# Altium PCB RFR24 AMS Design - MCU Stackup PCB V1.PcbDoc
Units mil, origin at the board's own origin, x right, y up, seen from the top; angles counter-clockwise.
Board outline 3960.47 x 1484.09 mil, 2 copper layers (Top Layer, Bottom Layer); 60 components, 283 nets, 228 pads, 43 vias.
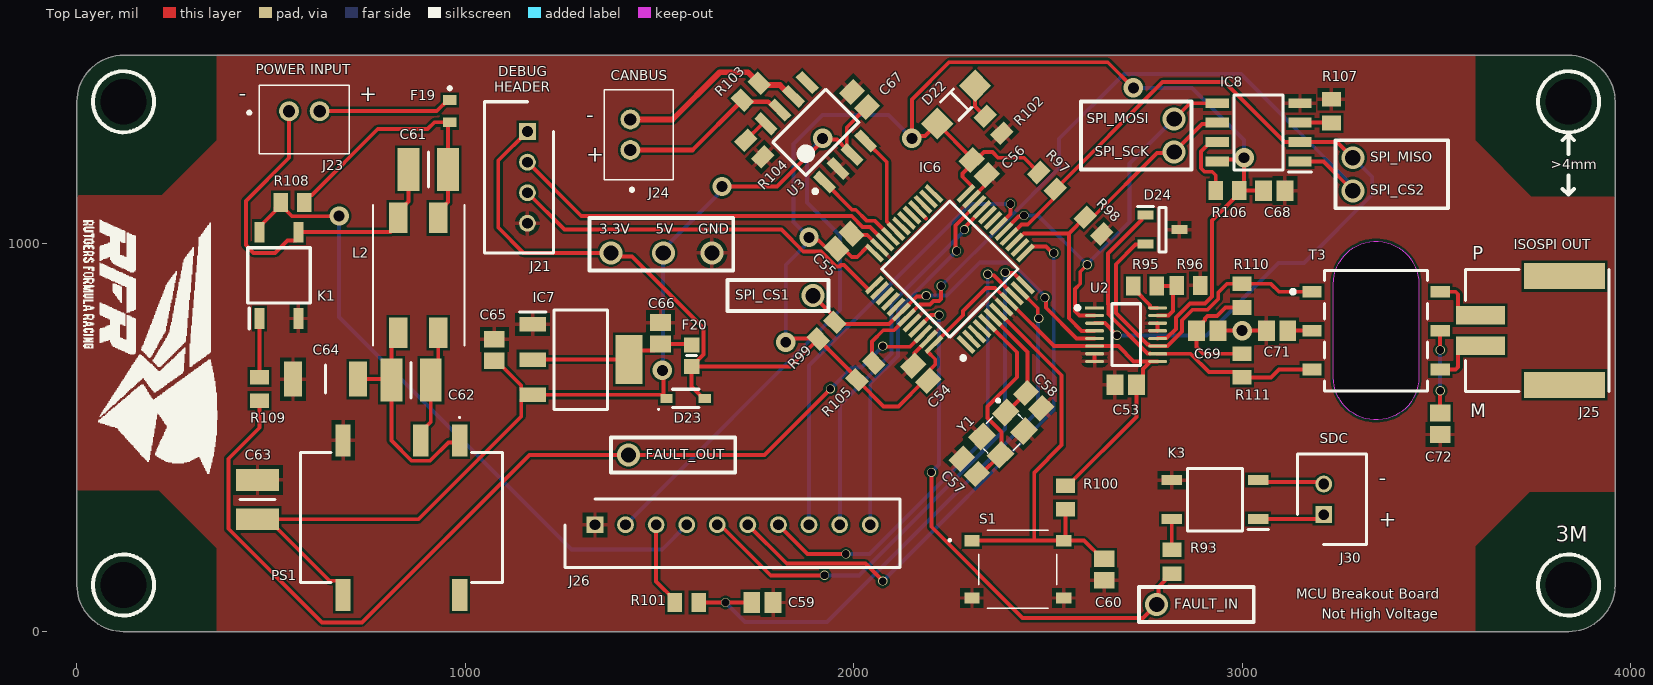
[diagram p0: Top Layer view]
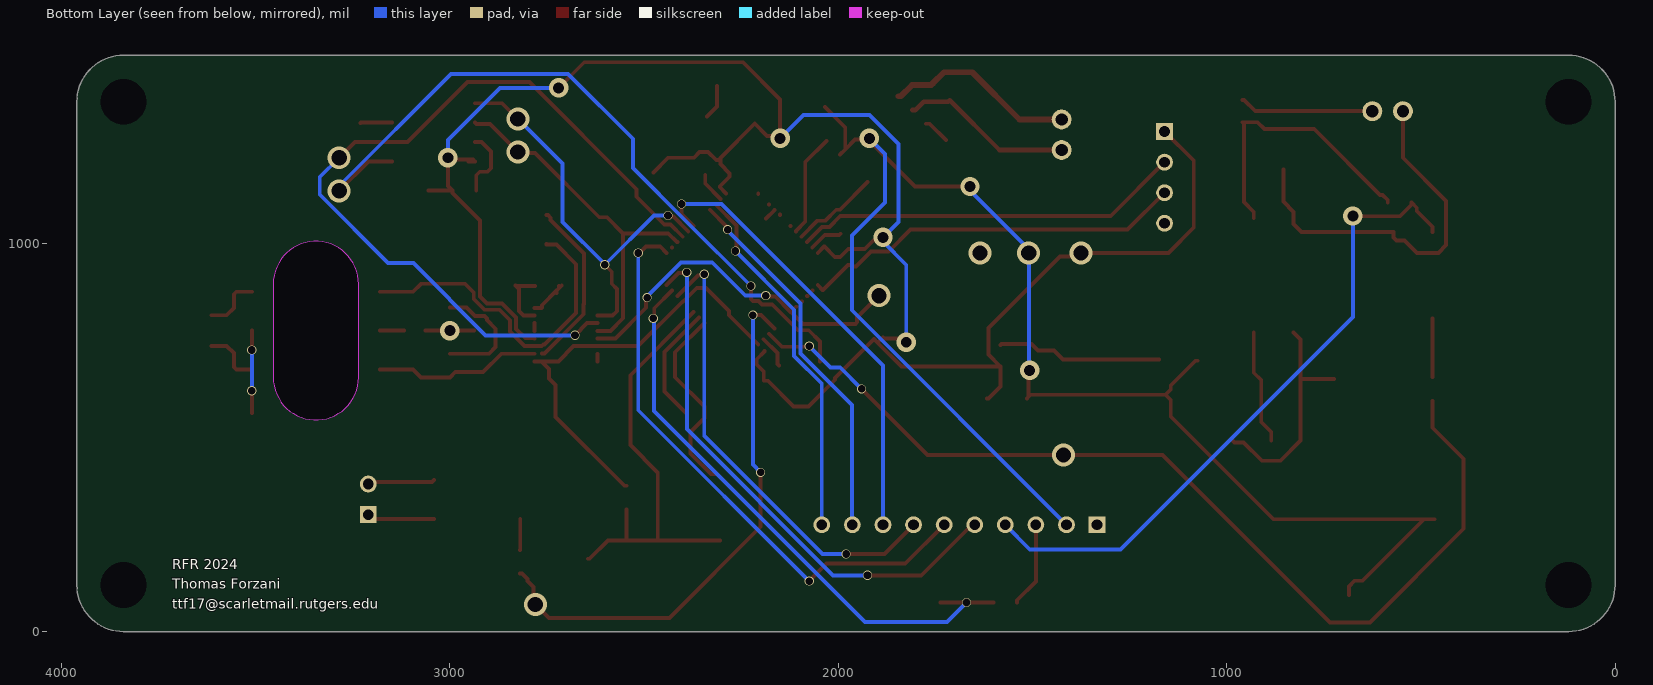
[diagram p1: Bottom Layer view, seen from below]
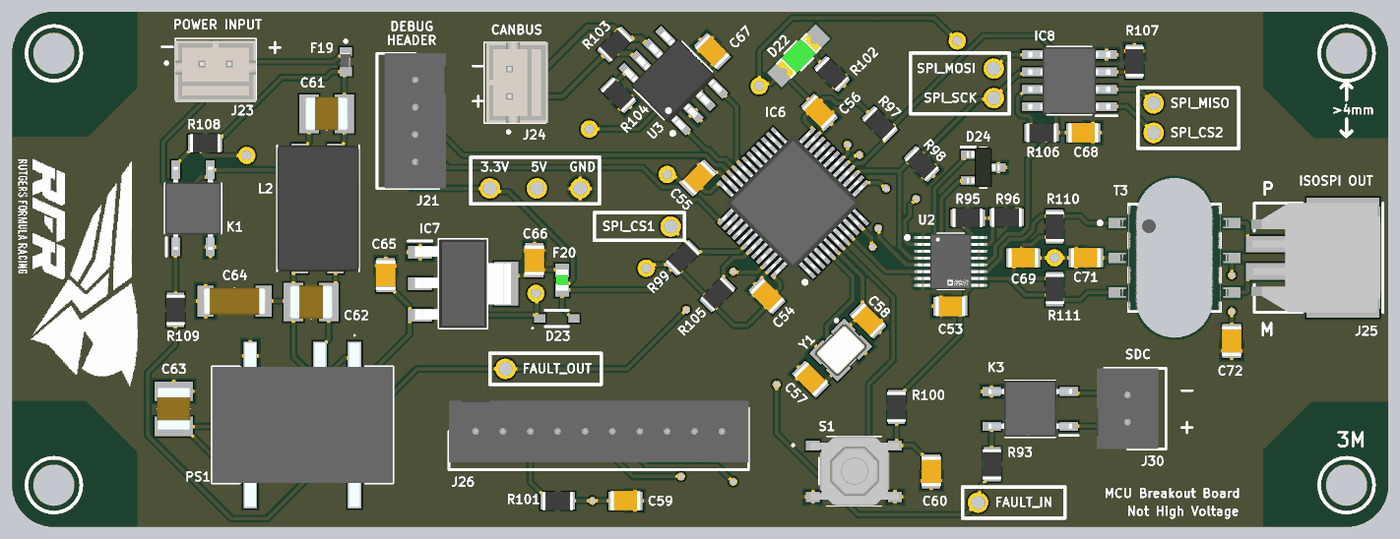
[diagram p2: 3D render of the assembled board from above, using the file's embedded part models]

## Layer stack, top to bottom
Top Solder: solder mask 0.4, Solder Resist, Dk 3.5
Top Layer: signal copper 1.4
Dielectric2: dielectric 12.6, FR-4, Dk 4.8
Bottom Layer: signal copper 1.4
Bottom Solder: solder mask 0.4, Solder Resist, Dk 3.5

## Board outline
0,120 0,1364.09 cw(c120,1364.09) 120,1484.09 3840.47,1484.09 cw(c3840.47,1364.09) 3960.47,1364.09 3960.47,120 cw(c3840.47,120) 3840.47,0 120,0 cw(c120,120)
cut-out: 3235,655 3235,895 cw(c3345,895.11) 3455,895 3455,655 cw(c3345,655)

## Design rules (kind name [scope] priority, off if disabled: settings)
Clearance [All] p1: gap=6 ignorepadtopadclearanceinfootprint=FALSE except(0: Arc-Hole Track-Hole SMDPad-Hole THPad-Hole Via-Hole Fill-Hole Poly-Hole Region-Hole Text-Hole)
DiffPairsRouting "Schematic Differential Pairs Routing" [InNet('CAN_P')] p1: maxlimit=10 minlimit=4 mostfreqgap=10 toplayer_minwidth=7 toplayer_maxwidth=12 toplayer_prefwidth=12 bottomlayer_minwidth=7 bottomlayer_maxwidth=12 bottomlayer_prefwidth=12 maxuncoupledlength=500
DiffPairsRouting [All] p2: maxlimit=10 minlimit=10 mostfreqgap=10 toplayer_minwidth=15 toplayer_maxwidth=15 toplayer_prefwidth=15 bottomlayer_minwidth=15 bottomlayer_maxwidth=15 bottomlayer_prefwidth=15 maxuncoupledlength=500
Length "Schematic Length Constraint" [InNetClass('Fuse')] p1: maxlimit=5905.51 minlimit=0
MatchedLengths "Schematic Matched Net Lengths" [InNetClass('I2C')] p1: tolerance=1000 checknetsindiffpair=FALSE checkdiffpairvsdiffpair=TRUE checkxsignals=TRUE checkothers=TRUE
PolygonConnect [All] p1: connectstyle=Relief reliefconductorwidth=10 reliefentries=4 polygonreliefangle="90 Angle" airgapwidth=10
RoutingVias [All] p1: holewidth=28 width=50 viastyle="Through Hole" minholewidth=28 minwidth=50 maxholewidth=28 maxwidth=50
SolderMaskExpansion [All] p1: expansion=4 istentingtop=FALSE
Width "Schematic Width Constraint" [InNetClass('HV')] p1: maxlimit=25 minlimit=10 preferedwidth=10 minimp=50.000000 maximp=50.000000 favimp=50.000000
Width [All] p2: maxlimit=10 minlimit=10 preferedwidth=10
29 further rules are at their usual default settings.

## Classes and differential pairs
net class TEMP[1..18]: TEMP1 TEMP2 TEMP3 TEMP4 TEMP5 TEMP6 TEMP7 TEMP8 TEMP9 TEMP10 TEMP11 TEMP12 TEMP13 TEMP14 TEMP15 TEMP16 TEMP17 TEMP18
net class PB[0..15]: PB0 PB1 PB2 PB3 PB4 PB5 PB6 PB7 PB8 PB9 PB10 PB11 PB12 PB13 PB14 PB15
net class PA[0..15]: PA0 PA1 PA2 PA3 PA4 PA5 PA6 PA7 PA8 PA9 PA10 PA11 PA12 PA13 PA14 PA15
net class I2C: SCL SDA
net class HV: +Vreg -INV C0 C1 C2 C3 C4 C5 C6 C7 C8 C9 C10 C11 C12 C13 C14 C15 C16 C17 C18 "Cell 0" "Cell 1" "Cell 2" "Cell 3" "Cell 4" "Cell 5" "Cell 6" "Cell 7" "Cell 8" "Cell 9" "Cell 10" "Cell 11" "Cell 12" "Cell 13" "Cell 14" "Cell 15" "Cell 16" "Cell 17" "Cell 18" CellsF1 CellsF2 CellsF3 CellsF4 CellsF5 CellsF6 CellsF7 CellsF8 CellsF9 CellsF10 CellsF11 CellsF12 CellsF13 CellsF14 CellsF15 CellsF16 CellsF17 CellsF18 CellsF18_Relayed DRIVE IMA_N IMB_N IPA_P IPB_P "isoSPI + Output" "isoSPI - Output" "LTC6820 IM" "LTC6820 IP" "Mux Output" NetC39_2 NetC40_2 NetC41_1 NetC42_1 NetC43_2 NetC44_2 NetC45_2 NetC46_2 NetC47_2 NetC48_1 NetC49_1 NetC49_2 NetC51_2 NetD2_1 NetD2_2 NetD3_1 NetD3_2 NetD4_1 NetD4_2 NetD5_1 NetD5_2 NetD6_1 NetD6_2 NetD7_1 NetD7_2 NetD8_1 NetD8_2 NetD9_1 NetD9_2 NetD10_1 NetD10_2 NetD11_1 NetD11_2 NetD12_1 NetD12_2 NetD13_1 NetD13_2 NetD14_1 NetD14_2 NetD15_1 NetD15_2 NetD16_1 NetD16_2 NetD17_1 NetD17_2 NetD18_1 NetD18_2 NetD19_1 NetD19_2 NetIC1_2 NetIC1_4 NetIC1_5 NetIC1_6 NetIC1_8 NetIC1_9 NetIC1_13 NetIC1_14 NetIC1_15 NetIC1_17 NetIC1_19 NetIC2_9 NetIC2_10 NetIC3_9 NetIC3_10 NetIC4_5 NetIC5_9 NetIC5_10 NetJ19_MP1 NetJ19_MP2 NetJ20_MP1 NetJ20_MP2 NetQ1_1 NetQ2_1 NetQ3_1 NetQ4_1 NetQ5_1 NetQ6_1 NetQ7_1 NetQ8_1 NetQ9_1 NetQ10_1 NetQ11_1 NetQ12_1 NetQ13_1 NetQ14_1 NetQ15_1 NetQ16_1 NetQ17_1 NetQ18_1 NetR82_1 NetR83_1 NetR83_2 NetT1_5 NetU1_40 NetU1_41 NetU1_44 NetU1_45 NetU1_46 NetU1_47 NetU1_52 NetU1_53 NetU1_54 S1 S2 S3 S4 S5 S6 S7 S8 S9 S10 S11 S12 S13 S14 S15 S16 S17 S18 SCL SDA TEMP1 TEMP2 TEMP3 TEMP4 TEMP5 TEMP6 TEMP7 TEMP8 TEMP9 TEMP10 TEMP11 TEMP12 TEMP13 TEMP14 TEMP15 TEMP16 TEMP17 TEMP18 "Temp Input" V+ V-
net class Fuse: "Cell 1" "Cell 2" "Cell 3" "Cell 4" "Cell 5" "Cell 6" "Cell 7" "Cell 8" "Cell 9" "Cell 10" "Cell 11" "Cell 12" "Cell 13" "Cell 14" "Cell 15" "Cell 16" "Cell 17" "Cell 18"
net class CellsF[1..18]: CellsF1 CellsF2 CellsF3 CellsF4 CellsF5 CellsF6 CellsF7 CellsF8 CellsF9 CellsF10 CellsF11 CellsF12 CellsF13 CellsF14 CellsF15 CellsF16 CellsF17 CellsF18
component class "U_RFR24 AMS Design - Thermistors V1": C52 IC2 IC3 IC4 IC5 R87 R88 R90 R92
component class "U_RFR24 AMS Design - Power Supply V1": C61 C62 C63 C64 C65 C66 D23 F19 F20 IC7 L2 PS1
component class "U_RFR24 AMS Design - Microcontroller V1": C54 C55 C56 C57 C58 C59 C60 D22 IC6 J21 R100 R101 R102 S1 Y1
component class "U_RFR24 AMS Design - LTC6820 V1": C53 C69 C71 C72 D24 J25 R95 R96 R97 R98 R99 R110 R111 T3 U2
component class "U_RFR24 AMS Design - Fuses V1": F1 F2 F3 F4 F5 F6 F7 F8 F9 F10 F11 F12 F13 F14 F15 F16 F17 F18 J1 J2 J3 J4 J5 J6 J7 J8 J9 J10 J11 J12 J13 J14 J15 J16 J17 J18
component class "U_RFR24 AMS Design - Fault V1": J30 K1 K3 R93 R108 R109
component class "U_RFR24 AMS Design - EEPROM V1": C68 IC8 R105 R106 R107
component class "U_RFR24 AMS Design - CAN V1": C67 R103 R104 U3
component class "RFR24 AMS Design - Top Level V1": J22 J23 J24 J26 J27 J28
differential pair CAN: +CAN_P -CAN_N

## Components (designator, comment, footprint, x,y, rotation, side; value= is the part's Value field where it differs from the comment)
C53 "Capacitor 1 uF +/- 10% 25 V 0805" CAPC2013X145X50LL20T25 2700.14,635.41 r0 top value=100nF
C54 "Capacitor 1 uF +/- 10% 25 V 0805" CAPC2013X145X50LL20T25 2172.58,665.41 r135 top value=22pF
C55 "Capacitor 1 uF +/- 10% 25 V 0805" CAPC2013X145X50LL20T25 1975,1005 r225 top value=22pF
C56 "Capacitor 1 uF +/- 10% 25 V 0805" CAPC2013X145X50LL20T25 2323.1,1194.89 r135 top value=22pF
C57 "Capacitor 1 uF +/- 10% 25 V 0805" CAPC2013X145X50LL20T25 2297.58,425.41 r315 top value=22pF
C58 "Capacitor 1 uF +/- 10% 25 V 0805" CAPC2013X145X50LL20T25 2463.1,594.89 r135 top value=22pF
C59 "Capacitor 1 uF +/- 10% 25 V 0805" CAPC2013X145X50LL20T25 1765,75 r0 top value=10nF
C60 "Capacitor 1 uF +/- 10% 25 V 0805" CAPC2013X145X50LL20T25 2645,160 r90 top value=100nF
C61 "885012209004" CAPC3225X220N 905,1190 r0 top
C62 "885012209004" CAPC3225X220N 860.41,647.42 r0 top
C63 "885012209014" CAPC3225X220N 465,340 r270 top
C64 "885342210003" CAPC4620X220N 640,650 r180 top
C65 "Capacitor 1 uF +/- 10% 25 V 0805" CAPC2013X145X50LL20T25 1075,725 r270 top value=2.2uF
C66 "Capacitor 1 uF +/- 10% 25 V 0805" CAPC2013X145X50LL20T25 1502.58,767.97 r270 top value=1uF
C67 "Capacitor 1 uF +/- 10% 25 V 0805" CAPC2013X145X50LL20T25 2015,1370 r135 top value=100nF
C68 "Capacitor 1 uF +/- 10% 25 V 0805" CAPC2013X145X50LL20T25 3082.58,1135.41 r0 top value=100nF
C69 "Capacitor 1 uF +/- 10% 25 V 0805" CAPC2013X145X50LL20T25 2910,775 r0 top value=10nF
C71 "Capacitor 1 uF +/- 10% 25 V 0805" CAPC2013X145X50LL20T25 3090,775 r180 top value=10nF
C72 "Capacitor 1 uF +/- 10% 25 V 0805" CAPC2013X145X50LL20T25 3510,535 r90 top value=10nF
D22 "HSMG-C150" FP-HSMG-C150-MFG 2263.87,1356.69 r225 top
D23 "unknown" INF-SOD323_V 1567.58,600.41 r90 top
D24 "MMBZ10VAL" SOT95P230X110-3N 2795,1035 r0 top
F19 "ERB-RE3R00V" ERBRE0R50V 960,1340 r270 top
F20 "04000026NR" FUSC1508X58N 1582.58,710.41 r270 top
IC6 "STM32F103C8T6TR" QFP50P900X900X160-48N 2247.58,933.52 r135 top
IC7 "TLV76133DCYR" SOT230P700X180-4N 1297.58,700.41 r0 top
IC8 "M95160-DRMN3TP_K" SOIC127P600X175-8N 3042.43,1285.41 r180 top
J21 "B4B-PH-K_LF__SN_" SHDR4W50P0X200_1X4_990X450X600P 1160,1287.48 r90 top
J23 "B2B-PH-K-S__LF__SN_" B2BPHKSLFSN 546.26,1340 r180 top
J24 "B2B-PH-K-S__LF__SN_" B2BPHKSLFSN 1425,1240 r270 top
J25 "502352-0200" 5023520200 3574.88,775.24 r90 top
J26 "B10B-PH-K-S_LF__SN_" SHDR10W50P0X200_1X10_2190X450X600P 1333.82,275 r180 top
J30 "B2B-PH-K-S_LF__SN_" SHDR2W50P0X200_1X2_590X450X600P 3210,301.26 r270 top
K1 "CPC1014NTR" CPC1014 520.41,917.42 r90 top
K3 "CPC1014NTR" CPC1014 2930,340 r180 top
L2 "744226S" WE-SL274 880.41,917.42 r270 top
PS1 "1769405241" 1769405241 835.41,293.6 r180 top
R93 "Resistor 1k +/-1% 0805 125 mW" RESC2013X70X40LL20T20 2820,180 r90 top value=100
R95 "Resistor 1k +/-1% 0805 125 mW" RESC2013X70X40LL20T20 2750,890 r0 top value=1k
R96 "Resistor 1k +/-1% 0805 125 mW" RESC2013X70X40LL20T20 2862.07,891.59 r0 top value=1k
R97 "Resistor 1k +/-1% 0805 125 mW" RESC2013X70X40LL20T20 2497.58,1160.41 r135 top value=2k
R98 "Resistor 1k +/-1% 0805 125 mW" RESC2013X70X40LL20T20 2617.58,1045.41 r135 top value=100k
R99 "Resistor 1k +/-1% 0805 125 mW" RESC2013X70X40LL20T20 1930,775 r225 top value=100k
R100 "Resistor 1k +/-1% 0805 125 mW" RESC2013X70X40LL20T20 2545,345 r90 top value=1k
R101 "Resistor 1k +/-1% 0805 125 mW" RESC2013X70X40LL20T20 1570,75 r0 top value=100
R102 "Resistor 1k +/-1% 0805 125 mW" RESC2013X70X40LL20T20 2360,1305 r135 top value=10k
R103 "Resistor 1k +/-1% 0805 125 mW" RESC2013X70X40LL20T20 1735,1390 r45 top value=120
R104 "Resistor 1k +/-1% 0805 125 mW" RESC2013X70X40LL20T20 1744.16,1243.83 r135 top value=4.7k
R105 "Resistor 1k +/-1% 0805 125 mW" RESC2013X70X40LL20T20 2030,670 r225 top value=100k
R106 "Resistor 1k +/-1% 0805 125 mW" RESC2013X70X40LL20T20 2962.58,1135.41 r0 top value=100k
R107 "Resistor 1k +/-1% 0805 125 mW" RESC2013X70X40LL20T20 3230,1340 r270 top value=100k
R108 "Resistor 1k +/-1% 0805 125 mW" RESC2013X70X40LL20T20 555,1105 r0 top value=4.7k
R109 "Resistor 1k +/-1% 0805 125 mW" RESC2013X70X40LL20T20 470,625 r270 top value=100
R110 "Resistor 1k +/-1% 0805 125 mW" RESC2013X70X40LL20T20 3000,865 r270 top value=50
R111 "Resistor 1k +/-1% 0805 125 mW" RESC2013X70X40LL20T20 3000,685 r90 top value=50
S1 "TS-1187A-B-A-B" TS1187ABAB 2422.58,160.41 r0 top
T3 "SM91502ALE" FP-SM91502ALE-MFG 3345,775 r0 top
U2 "LTC6820IMS#3ZZTRPBF" FP-MS-16-05-08-1669-IPC_C 2701.49,764.62 r0 top
U3 "MCP2551-I/SN" MCHP-SN8_V 1902.58,1285.41 r135 top
Y1 "X322512MSB4SI" X322512MSB4SI 2384.54,509.69 r225 top

## Footprints (in the part's own frame and the unit in brackets; to place one, negate y for a bottom-side part, rotate by r counter-clockwise, add the part's x,y. Pads: shape width x height; smd on the part's side, far side on the other; paste and mask are expansions set on the pad)
1769405241 [mm]
  rect 1x2.1 smd: 1(-3.81,-5.05) 2(-1.27,-5.05) 4(3.81,-5.05) 5(3.81,5.05) 8(-3.81,5.05)
  silkscreen extent -6.6,-6.6 6.6,4.25, body extent -6.6,-6 6.6,6, height 7.6
5023520200 [mm]
  rect 1.2x3.2 smd: 1(-1,-1) 2(1,-1)
  rect 1.7x5.3 smd: 3(-3.55,-6.48) 4(3.55,-6.48)
  silkscreen extent -4,-9.4 4,0, body extent -4,-9.2 4,0.2, height 6.4
B2BPHKSLFSN [mm]
  round 1.3 hole 0.8: 1(0,0) 2(-2,0)
  silkscreen extent -3.95,-1.7 2.7,2.8, body extent -3.95,-1.53 1.95,2.97, height 5.91
CAPC2013X145X50LL20T25 [mm] "Chip Capacitor, 2-Leads, Body 2.2x1.45mm, IPC High Density"
  rect 1.1x1.35 smd: 1(-0.7,0) 2(0.7,0)
  body extent -1.1,-0.72 1.1,0.73, height 1.45
CAPC3225X220N [mm]
  rect 1.43x2.82 smd: 1(-1.29,0) 2(1.29,0)
  silkscreen extent 0,-1.15 0,1.15, body extent -1.6,-1.25 1.6,1.25, height 2.2
CAPC4620X220N [mm]
  rect 1.18x2.3 smd: 1(-2.12,0) 2(2.12,0)
  silkscreen extent 0,-0.91 0,0.91, body extent -2.3,-1.01 2.3,1.01, height 2.2
CPC1014 [mm]
  rect 1.35x0.65 smd: 1(-2.825,1.27) 2(-2.825,-1.27) 3(2.825,-1.27) 4(2.825,1.27)
  silkscreen extent -3.5,-2.04 1.8,2.04, body extent -3.05,-2.04 3.05,2.04, height 2.18
ERBRE0R50V [mm]
  rect 0.65x0.9 smd: 1(-0.725,0) 2(0.725,0)
  silkscreen extent -1.6,-0.1 -1.4,0.1, body extent -0.8,-0.4 0.8,0.4, height 0
FP-HSMG-C150-MFG [mm]
  rect 1.5x1.5 smd paste+0 mask+0: 1(-1.75,0) 2(1.75,0)
  silkscreen extent -0.6,-0.85 0.6,0.85, body extent -2.6,-0.95 2.6,0.95, height 0.25
FP-MS-16-05-08-1669-IPC_C [mm]
  rect 1.24x0.212 smd paste+0 mask+0: 1(-2.06,1.75)
  rrect100% 1.24x0.212 smd paste+0 mask+0: 2(-2.06,1.25) 3(-2.06,0.75) 4(-2.06,0.25) 5(-2.06,-0.25) 6(-2.06,-0.75) 7(-2.06,-1.25) 8(-2.06,-1.75) 9(2.06,-1.75) 10(2.06,-1.25) 11(2.06,-0.75) 12(2.06,-0.25) 13(2.06,0.25) 14(2.06,0.75) 15(2.06,1.25) 16(2.06,1.75)
  silkscreen extent -3.3,-2.02 0.94,2.02, body extent -2.45,-2.02 2.45,2.02, height 1.1
FP-SM91502ALE-MFG [mm]
  rect 1.27x0.76 smd paste+0 mask+0: 1(-4.19,2.54) 2(-4.19,0) 3(-4.19,-2.54) 4(4.19,-2.54) 5(4.19,0) 6(4.19,2.54)
  silkscreen extent -5.56,-3.94 3.36,3.94, body extent -4.92,-4.04 4.92,4.04, height 0.25
FUSC1508X58N [mm]
  rect 1x1.02 smd: 1(-0.705,0) 2(0.705,0)
  silkscreen extent 0,-0.32 0,0.32, body extent -0.77,-0.43 0.77,0.43, height 0.58
INF-SOD323_V [mm] "SOD, 2-Leads, Body 1.7x1.25 mm"
  rect 0.6x0.8 smd: 1(0,1.25) 2(0,-1.25)
  silkscreen extent -0.76,-0.85 0.6,1.83, body extent -0.63,-0.85 0.63,0.85, height 1.1
MCHP-SN8_V [mm] "SOIC, 8-Leads, Body 4.9x3.9mm, Pitch 1.27mm"
  rect 1.55x0.6 smd: 1(-2.7,1.905) 2(-2.7,0.635) 3(-2.7,-0.635) 4(-2.7,-1.905) 5(2.7,-1.905) 6(2.7,-0.635) 7(2.7,0.635) 8(2.7,1.905)
  silkscreen extent -2.82,-2.45 1.53,2.88, body extent -3,-2.45 3,2.45, height 1.75
QFP50P900X900X160-48N [mm]
  rect 1.475x0.3 smd: 1(-4.238,2.75) 2(-4.238,2.25) 3(-4.238,1.75) 4(-4.238,1.25) 5(-4.238,0.75) 6(-4.238,0.25) 7(-4.238,-0.25) 8(-4.238,-0.75) 9(-4.238,-1.25) 10(-4.238,-1.75) 11(-4.238,-2.25) 12(-4.238,-2.75) 25(4.238,-2.75) 26(4.238,-2.25) 27(4.238,-1.75) 28(4.238,-1.25) 29(4.238,-0.75) 30(4.238,-0.25) 31(4.238,0.25) 32(4.238,0.75) 33(4.238,1.25) 34(4.238,1.75) 35(4.238,2.25) 36(4.238,2.75)
  rect 0.3x1.475 smd: 13(-2.75,-4.238) 14(-2.25,-4.238) 15(-1.75,-4.238) 16(-1.25,-4.238) 17(-0.75,-4.238) 18(-0.25,-4.238) 19(0.25,-4.238) 20(0.75,-4.238) 21(1.25,-4.238) 22(1.75,-4.238) 23(2.25,-4.238) 24(2.75,-4.238) 37(2.75,4.238) 38(2.25,4.238) 39(1.75,4.238) 40(1.25,4.238) 41(0.75,4.238) 42(0.25,4.238) 43(-0.25,4.238) 44(-0.75,4.238) 45(-1.25,4.238) 46(-1.75,4.238) 47(-2.25,4.238) 48(-2.75,4.238)
  silkscreen extent -4.85,-3.15 3.15,3.62, body extent -4.5,-4.5 4.5,4.5, height 1.6
RESC2013X70X40LL20T20 [mm] "Chip Resistor, 2-Leads, Body 2.2x1.35mm, IPC High Density"
  rect 0.95x1.25 smd: 1(-0.775,0) 2(0.775,0)
  body extent -1.1,-0.67 1.1,0.67, height 0.7
SHDR2W50P0X200_1X2_590X450X600P [mm]
  rect 1.1x1.1 hole 0.7: 1(0,0)
  round 1.1 hole 0.7: 2(-2,0)
  silkscreen extent -3.95,-1.7 1.95,2.8, body extent -3.95,-2.25 1.95,2.25, height 6
SHDR4W50P0X200_1X4_990X450X600P [mm]
  rect 1.1x1.1 hole 0.7: 1(0,0)
  round 1.1 hole 0.7: 2(-2,0) 3(-4,0) 4(-6,0)
  silkscreen extent -7.95,-1.7 1.95,2.8, body extent -7.95,-2.25 1.95,2.25, height 6
SHDR10W50P0X200_1X10_2190X450X600P [mm]
  rect 1.1x1.1 hole 0.7: 1(0,0)
  round 1.1 hole 0.7: 2(-2,0) 3(-4,0) 4(-6,0) 5(-8,0) 6(-10,0) 7(-12,0) 8(-14,0) 9(-16,0) 10(-18,0)
  silkscreen extent -19.95,-1.7 1.95,2.8, body extent -19.95,-2.25 1.95,2.25, height 6
SOIC127P600X175-8N [mm]
  rect 1.525x0.65 smd: 1(-2.712,1.905) 2(-2.712,0.635) 3(-2.712,-0.635) 4(-2.712,-1.905) 5(2.712,-1.905) 6(2.712,-0.635) 7(2.712,0.635) 8(2.712,1.905)
  silkscreen extent -3.47,-2.45 1.6,2.58, body extent -3,-2.45 3,2.45, height 1.75
SOT95P230X110-3N [mm]
  rect 1.05x0.6 smd: 1(-1.1,0.95) 2(-1.1,-0.95) 3(1.1,0)
  silkscreen extent -1.63,-1.45 0.23,1.5, body extent -1.2,-1.45 1.2,1.45, height 0.95
SOT230P700X180-4N [mm]
  rect 1.75x0.95 smd: 1(-3.15,2.3) 2(-3.15,0) 3(-3.15,-2.3)
  rect 1.75x3.2 smd: 4(3.15,0)
  silkscreen extent -4.03,-3.25 1.75,3.25, body extent -3.5,-3.25 3.5,3.25, height 1.68
TS1187ABAB [mm]
  rect 1x0.75 smd: A1(-3,1.875) B1(3,1.875) C1(-3,-1.875) D1(3,-1.875)
  silkscreen extent -4.5,-2.55 2.55,2.55, body extent -3.2,-2.55 3.3,2.55, height 1.5
WE-SL274 [mm]
  rect 2x1.2 smd: 1(-3.75,1.27) 2(-3.75,-1.34) 3(3.75,-1.34) 4(3.75,1.27)
  silkscreen extent -4.6,-3 4.6,3, body extent -4.6,-3 4.6,3, height 5
X322512MSB4SI [mm]
  rect 1.4x1.2 smd: 1(-1.1,-0.85) 2(1.1,-0.85) 3(1.1,0.85) 4(-1.1,0.85)
  silkscreen extent -1.6,-1.8 1.6,1.25, body extent -1.6,-1.25 1.6,1.25, height 0.7

## Part data
C53 C54 C55 C56 C57 C58 C59 C60 C65 C66 C67 C68 C69 C71 C72: library part CMP-001-00010-6, "Chip Capacitor, 1 uF, +/-10%, 25 V, 0805 (2012 Metric)", Capacitor Type=Ceramic, Case/Package=0805, Max Operating Temperature=125°C, Min Operating Temperature=-55°C, Tolerance=10%, Voltage Rating=25V, Mounting Technology=SM, Pins=2, RoHS Compliant=True
C61 C62: "Capacitor", Manufacturer_Name="Wurth Elektronik", Mouser Part Number=710-885012209004, Datasheet Link=https://katalog.we-online.com/pbs/datasheet/885012209004.pdf, Height=2.2mm, Manufacturer_Part_Number=885012209004, Mouser Price/Stock=https://www.mouser.com/Search/Refine.aspx?Keyword=710-885012209004
C63: "Capacitor", Manufacturer_Name="Wurth Elektronik", Mouser Part Number=710-885012209014, Datasheet Link=https://katalog.we-online.com/pbs/datasheet/885012209014.pdf, Height=2.2mm, Manufacturer_Part_Number=885012209014, Mouser Price/Stock=https://www.mouser.com/Search/Refine.aspx?Keyword=710-885012209014
C64: "Capacitor", Manufacturer_Name="Wurth Elektronik", Mouser Part Number=710-885342210003, Datasheet Link=https://katalog.we-online.com/pbs/datasheet/885342210003.pdf, Height=2.2mm, Manufacturer_Part_Number=885342210003, Mouser Price/Stock=https://www.mouser.co.uk/ProductDetail/Wurth-Elektronik/885342210003?qs=MLItCLRbWsxO%2Fvro%2Fk5QUQ%3D%3D
D22: library part CMP-2000-05061-2, "LED GREEN DIFFUSED 1206 SMD", Colour=Green, Forward Current=20mA, Forward Voltage=2.2V, Manufacturer=Broadcom, Max Junction Temp=+95°C, Power Dissipation=65mW, Reverse Voltage=5V, Temperature="-40°C to +85°C", Temperature Range High=+85°C, Temperature Range Low=-40°C, Automotive=No, Category=Diode, ComponentLink2Description=Datasheet, ComponentLink2URL=https://docs.broadcom.com/docs/AV02-0551EN, Device Class L1=Optoelectronics, Device Class L2=LEDs, Device Class L3=unset, Digikey Description="LED GREEN DIFFUSED 1206 SMD", Height=1.2mm, Ipc Land Pattern Name=DIOCP320160X55, Lead Free=Yes, Led Orientation="Top View", Luminous Intensity=15mcd, Manufacturer Part Number=HSMG-C150, Mouser Description="LED Uni-Color Green 570nm 2-Pin Chip LED T/R", Octopart=https://octopart.com/hsmg-c150-broadcom-71131304, Package=HSMG-C150, Peak Emmision Wavelength=570nm, RoHS=TRUE, Viewing Angle=170°, Wavelength=572nm
D23: library part CMP-1182-00005-1, "Silicon Schottky Diode, -55 to 125 degC, SOD323, Reel, Green", Manufacturer=Infineon, PartNumber=BAS170W, ComponentLink1Description="Manufacturer URL", ComponentLink1URL=http://www.infineon.com/, ComponentLink2Description=Datasheet, ComponentLink2URL=http://www.infineon.com/dgdl/bas70_bas170series.pdf?folderId=db3a30431400ef68011425f1ca2505e3&fileId=db3a304314dca389011518ad41680e12, ComponentLink3Description="Package Specification", ComponentLink3URL=http://www.infineon.com/dgdl/SOD323-Package_Overview.pdf?folderId=db3a30431936bc4b011952aab84f3bbe&fileId=db3a30431936bc4b011952beed653be3, Configuration=Single, CT (max)="2Â pF", Green=TRUE, IF (max)="70Â mA", Mounting Technology="Surface Mount", PackageDescription="2-Pin Small Outline Diode Package, 1.25 x 1.7 mm Body", PackageReference=SOD323, Packing=Reel, VF (max)="1,000Â mV", VR (max)="70Â V"
D24: "TVS Diode (Uni-directional)", Manufacturer_Name=Nexperia, Mouser Part Number=N/A, Datasheet Link=https://componentsearchengine.com/Datasheets/2/MMBZ10VAL.pdf, Height=1.1mm, Manufacturer_Part_Number=MMBZ10VAL, Mouser Price/Stock=https://www.mouser.co.uk/ProductDetail/Nexperia/MMBZ10VAL?qs=vHuUswq2%252Bsyln3ntzeiFlQ%3D%3D
F19: "Fuse", Manufacturer_Name=Panasonic, Mouser Part Number=667-ERB-RE3R00V, Arrow Part Number=ERB-RE3R00V, Arrow Price/Stock=https://www.arrow.com/en/products/erbre3r00v/panasonic?region=nac, Datasheet Link=https://industrial.panasonic.com/cdbs/www-data/pdf/AFA0000/AFA0000C7.pdf, Height=0.64mm, Manufacturer_Part_Number=ERB-RE3R00V, Mouser Price/Stock=https://www.mouser.co.uk/ProductDetail/Panasonic/ERB-RE3R00V?qs=YIEcsSB2Lz476AVmswLSkg%3D%3D
F20: "Fuse", Manufacturer_Name=LITTELFUSE, Mouser Part Number=576-04000026NR, Arrow Part Number=04000026NR, Arrow Price/Stock=https://www.arrow.com/en/products/04000026nr/littelfuse?region=nac, Datasheet Link=https://www.mouser.com/catalog/specsheets/Littelfuse_07032019_Fuse_400M_Datasheet.pdf, Height=0.582mm, Manufacturer_Part_Number=04000026NR, Mouser Price/Stock=https://www.mouser.co.uk/ProductDetail/Littelfuse/04000026NR?qs=byeeYqUIh0MItL5FgjMqyw%3D%3D
IC6: "Integrated Circuit", Manufacturer_Name=STMicroelectronics, Mouser Part Number=511-STM32F103C8T6TR, Arrow Part Number=STM32F103C8T6TR, Arrow Price/Stock=https://www.arrow.com/en/products/stm32f103c8t6tr/stmicroelectronics?region=europe, Datasheet Link=http://media.digikey.com/pdf/Data%20Sheets/ST%20Microelectronics%20PDFS/STM32F103x8,B.pdf, Height=1.6mm, Manufacturer_Part_Number=STM32F103C8T6TR, Mouser Price/Stock=https://www.mouser.co.uk/ProductDetail/STMicroelectronics/STM32F103C8T6TR?qs=5HwTSiuA5HDxFj62n06yag%3D%3D
IC7: "Integrated Circuit", Manufacturer_Name="Texas Instruments", Mouser Part Number=595-TLV76133DCYR, Arrow Part Number=TLV76133DCYR, Arrow Price/Stock=https://www.arrow.com/en/products/tlv76133dcyr/texas-instruments?region=nac, Datasheet Link=https://www.ti.com/lit/ds/symlink/tlv761.pdf?ts=1679984111185&ref_url=https%253A%252F%252Fwww.ti.com%252Fsitesearch%252Fen-us%252Fdocs%252Funiversalsearch.tsp%253FlangPref%253Den-US%2526searchTerm%253DTLV76133DCYR%2526nr%253D2, Height=1.8mm, Manufacturer_Part_Number=TLV76133DCYR, Mouser Price/Stock=https://www.mouser.co.uk/ProductDetail/Texas-Instruments/TLV76133DCYR?qs=9vOqFld9vZV5BPjUhjTZUA%3D%3D
IC8: "Integrated Circuit", Arrow Part Number=M95160-DRMN3TP/K, Manufacturer_Name=STMicroelectronics, Mouser Part Number=511-M95160-DRMN3TP/K, Arrow Price/Stock=https://www.arrow.com/en/products/m95160-drmn3tpk/stmicroelectronics?region=nac, Datasheet Link=https://www.mouser.jp/datasheet/2/389/dm00066376-1797784.pdf, Height=1.75mm, Manufacturer_Part_Number=M95160-DRMN3TP/K, Mouser Price/Stock=https://www.mouser.co.uk/ProductDetail/STMicroelectronics/M95160-DRMN3TP-K?qs=4ccVDqXDOrm%252BfzFwsEAdxA%3D%3D
J21: "Connector", Manufacturer_Name="JST (JAPAN SOLDERLESS TERMINALS)", Manufacturer_Part_Number=B4B-PH-K(LF)(SN), Datasheet Link=http://www.jst-mfg.com/product/pdf/eng/ePH.pdf, Height=6mm
J23 J24: "Circulator or Directional Coupler", Manufacturer_Name="JST (JAPAN SOLDERLESS TERMINALS)", Manufacturer_Part_Number="B2B-PH-K-S (LF)(SN)", Datasheet Link=http://www.jst-mfg.com/product/pdf/eng/ePH.pdf, Height=6mm
J25: "Connector", Manufacturer_Name=Molex, Mouser Part Number=538-502352-0200, Arrow Part Number=502352-0200, Arrow Price/Stock=https://www.arrow.com/en/products/5023520200/molex?region=europe, Datasheet Link=https://www.molex.com/pdm_docs/sd/5023520200_sd.pdf, Manufacturer_Part_Number=502352-0200, Mouser Price/Stock=https://www.mouser.co.uk/ProductDetail/Molex/502352-0200?qs=cPOO8qjhL6OPJnOOkJoW%252Bw%3D%3D
J26: "Connector", Arrow Part Number=B10B-PH-K-S(LF)(SN), Manufacturer_Name="JST (JAPAN SOLDERLESS TERMINALS)", Arrow Price/Stock=https://www.arrow.com/en/products/b10b-ph-k-s-lf-sn/jst-manufacturing?region=europe, Datasheet Link=http://uk.rs-online.com/web/p/products/8201428, Height=6mm, Manufacturer_Part_Number=B10B-PH-K-S(LF)(SN)
J30: "Connector", Arrow Part Number=B2B-PH-K-S(LF)(SN), Manufacturer_Name="JST (JAPAN SOLDERLESS TERMINALS)", Arrow Price/Stock=https://www.arrow.com/en/products/b2b-ph-k-s-lf-sn/jst-manufacturing?region=europe, Datasheet Link=https://datasheet.lcsc.com/szlcsc/JST-Sales-America-B2B-PH-K-S-LF-SN_C131337.pdf, Height=6mm, Manufacturer_Part_Number=B2B-PH-K-S(LF)(SN)
K1 K3: library part CMP-329-000002-2, "SSR RELAY SPST-NO (1 Form A) 4-SOP (0.150\", 3.81mm)", Component Type=Standard, ComponentLink1Description="DigiKey Link", ComponentLink1URL=https://www.digikey.com/en/products/detail/ixys-integrated-circuits-division/CPC1014NTR/1973284, ComponentLink2Description=Datasheet, ComponentLink2URL=https://www.ixysic.com/home/pdfs.nsf/www/CPC1014N.pdf/$file/CPC1014N.pdf, Design Item ID="IXYS CPC1014NTR", Pin Count=4, Source=CPC1014NTR.SchLib
L2: "Inductor", Manufacturer_Name="Wurth Elektronik", Mouser Part Number=710-744226S, Datasheet Link=http://componentsearchengine.com/Datasheets/3/744226S.pdf, Manufacturer_Part_Number=744226S, Mouser Price/Stock=https://www.mouser.co.uk/ProductDetail/Wurth-Elektronik/744226S?qs=PGXP4M47uW7i1tILwHyAXg%3D%3D
PS1: "Power Supply", Manufacturer_Name="Wurth Elektronik", Datasheet Link=https://www.we-online.com/components/products/datasheet/1769405241.pdf, Height=7.5mm, Manufacturer_Part_Number=1769405241
R93 R95 R96 R97 R98 R99 R100 R101 R102 R103 R104 R105 R106 R107 R108 R109 R110 R111: library part CMP-009-00010-5, "Chip Resistor, 1 KOhm, +/- 1%, 0.125 W, -55 to 155 degC, 0805 (2013 Metric)", Case/Package=0805, Max Operating Temperature=155°C, Min Operating Temperature=-55°C, Power=125mW, Tolerance=1%, Voltage Rating=150V, Mounting Technology=SM, Pins=2, RoHS Compliant=True
S1: "Switch", Manufacturer_Name="XKB Connectivity", Datasheet Link=http://www.helloxkb.com/public/images/pdf/TS-1187A-X-X-X.pdf, Height=4.05mm, Manufacturer_Part_Number=TS-1187A-B-A-B
T3: library part CMP-07264-000001-1, "BMS XFORMER 1-CH 1000V AECQ +125", Isolation Voltage=4300VDC, Manufacturer=Bourns, Package=0, Temperature="-40°C to +125°C", Temperature Range High=+125°C, Temperature Range Low=-40°C, Automotive=Yes, Automotive Grade="Grade 1", Category=Trans, ComponentLink2Description=Datasheet, ComponentLink2URL=https://www.bourns.com/docs/product-datasheets/SM91502AL.pdf, Device Class L1="Passive Components", Device Class L2=Transformers, Device Class L3=unset, Digikey Description="BMS XFORMER 1-CH 1000V AECQ +125", Height=5.72mm, Insertion Loss=-0.25dB, Lead Free=Yes, Manufacturer Part Number=SM91502ALE, Octopart=https://octopart.com/sm91502ale-bourns-95732123, Return Loss=-22dB, RoHS=TRUE, Standoff Height=0.13mm, Turns Ratio=1:1
U2: library part CMP-09093-000139-1, "IC INTERFACE SPECIALIZED 16MSOP"
U3: library part CMP-0186-00138-3, "High-Speed CAN Transceiver, /  1 Mb/s, 4.5 to 5.5 V, 8-Pin SOIC (SN), Industrial Temperature, RoHS, Tube", Manufacturer=Microchip, ComponentLink1Description="Manufacturer URL", ComponentLink1URL=http://www.microchip.com/, ComponentLink2Description=Datasheet, ComponentLink2URL=http://ww1.microchip.com/downloads/en/DeviceDoc/21667f.pdf, ComponentLink3Description="Package Specification", ComponentLink3URL=http://www.microchip.com/stellent/groups/techpub_sg/documents/packagingspec/en012702.pdf, DatasheetVersion="Rev. F, 07/2010", Mounting Technology="Surface Mount", PackageDescription="8-Pin Small Outline Integrated Circuit, Body 4.9 x 3.9 mm, Pitch 1.27 mm", PackageReference=SN8, RoHSCompliant=true
Y1: "Crystal or Oscillator", Manufacturer_Name="Yangxing Tech", Datasheet Link=https://datasheet.lcsc.com/szlcsc/Yangxing-Tech-X322512MSB4SI_C9002.pdf, Height=0.8mm, Manufacturer_Part_Number=X322512MSB4SI

## Free pads (board coordinates)
  round 60 hole 118.11: 7(120,120) 7(120,1364.09) 7(3840.47,120) 7(3840.47,1364.09)

## Via types
v1: diameter 23.62, hole 19.68, Top Layer to Bottom Layer, 23 vias
v2: diameter 59.06, hole 39.37, Top Layer to Bottom Layer, 10 vias
v3: diameter 50, hole 28, Top Layer to Bottom Layer, 10 vias

## Nets (pads, with @x,y where several pads share a name; then routed paths per layer and width w, separated by ;. In a path a pad name is that pad's centre, name@x,y a point inside that pad or via, vN(x,y) a via of type N, cw(c..) or ccw(c..) an arc to the next point about the centre after c; other vN are vias at no path point)
+3.3: C53.2 C54.1 C55.2 C56.2 C68.1 D22.2 D23.2 F20.2 IC6.9 IC6.24 IC6.36 IC6.48 IC8.8 J21.1 R97.2 R99.2 R100.2 R105.2 R106.2 U2.6 U2.9 U2.12 | length 6677
  Top Layer w10: J21.1 1085,1212.48 1085,1040 1150,975 v2(1375,975) 1384.39,965.61 1429.39,965.61 1613.66,781.34 1613.66,713.34 F20.2@1582.98,682.65 ; D23.2 1612.86,600.41 1582.58,630.68 F20.2 F20.2@1582.98,682.65 ; v3(1825,745) 1835.82,745 1845.82,755 1882.27,755 1884.87,757.6 1897.47,745 R99.2@1900,745 ; v3(1885,1015) 1892.65,1007.35 1910.13,1007.35 1931.96,985.51 1974.49,985.51 1995,965 2009.11,965 2035.41,991.3 2036.69,991.3 IC6.36 ; IC6.48@2189.81,722.62 2189.81,721.34 2210,701.15 2210,687.4 2192.07,669.47 C54.1 2180.92,645.92 2115,580 2076.85,580 R105.2 2008.42,653.42 R99.2 R99.2@1900,745 ; IC6.48 2281.71,814.53 2281.71,825.8 2340.91,885 2364.42,885 2399.08,850.34 IC6.9 2515.61,735.09 U2.6 2681.39,735.09 2720.76,695.72 U2.9@2763.98,695.72 ; IC6.24 2305.36,1144.41 2305.36,1145.69 2280,1171.06 2280,1180 2303.61,1203.61 C56.2 ; R97.2 2437.99,1220 2372.02,1220 2357.02,1235 2335,1235 2314.38,1214.38 C56.2 ; R100.2 2550.91,375.51 2727.7,552.31 C53.2 2744.36,652.06 2744.36,676.09 U2.9@2763.98,695.72 ; v3(2720,1400) 2654.14,1465.86 2245.86,1465.86 2150,1370 v3(2150,1270) 2156.49,1276.49 2183.66,1276.49 D22.2 2303.61,1219.51 C56.2 ; U2.9 U2.9@2763.98,695.72 ; U2.12 2783.4,755.59 2805.42,755.59 2829.36,779.53 2829.36,808.33 2865.6,844.57 2904.43,844.57 2922.51,862.65 2922.51,1058.92 2993.1,1129.5 R106.2 ; IC8.8 IC8.8@2952.88,1210.41 ; IC8.8@2940.45,1215.2 3000.2,1215.2 v3(3005,1220) 3005,1147.31 R106.2 ; C68.1 R106.2 ; F20.2@1582.98,682.65 1837.65,682.65 R99.2@1900,745
  Bottom Layer w10: v3(1825,745) 1825,944.18 v3@1885,1004.18 ; v3(1885,1015) 1845,1055 1845,1255 1920,1330 2090,1330 v3(2150,1270) ; v3(2720,1400) 2870.91,1400 3005,1265.91 v3(3005,1220)
+5: C63.2 C65.2 C67.1 D23.1 IC7.3 J26.2 PS1.5 U3.3 | length 4039.4
  Top Layer w10: C63.2 C63.2@492.36,289.21 ; PS1.5 685.41,116.43 670.72,131.12 650.46,131.12 C63.2@492.36,289.21 ; C65.2 1079.92,697.44 1144.12,633.24 1144.12,623.56 IC7.3@1157.82,609.86 ; v3(1507.5,672.5) 1510,670 D23.1@1510,604.84 ; D23.1@1514.43,600.41 D23.1@1510,604.84 ; v3(1660.92,1146) 1802.65,1146 v3@1923.33,1266.67 ; v3(1920,1270) v3@1923.33,1266.67 ; U3.3 U3.3@1982.2,1241.14 ; C67.1 1982.2,1298.23 U3.3@1982.2,1241.14 ; C63.2@492.36,289.21 879.21,289.21 1144.12,554.12 1144.12,596.16 IC7.3@1157.82,609.86 ; IC7.3@1157.82,609.86 IC7.3 1504.99,609.86 D23.1@1510,604.84 ; v3@1923.33,1266.67 1956.67,1266.67 U3.3@1982.2,1241.14
  Bottom Layer w10: J26.2 1965,827.44 1965,1020 1880,1105 1880,1230 v3(1920,1270) ; v3(1507.5,672.5) 1508.75,673.75 1508.75,973.75 v2(1510,975) 1510,985.04 1660.92,1135.96 v3(1660.92,1146)
+12: C61.2 F19.2 L2.1 R108.2 | length 722.1
  Top Layer w10: R108.2 585.51,1110.91 599.21,1124.61 605.12,1124.61 774.51,1294 903.16,1294 920.62,1311.46 F19.2 955.79,1307.24 C61.2 955.79,1106.18 930.41,1080.8 L2.1
+Vreg: 
-INV: 
-VIN: C62.1 C64.1 L2.3 PS1.1 | length 591.7
  Top Layer w10: C64.1 807.04,650 C62.1 ; L2.3 809.62,751.75 C62.1 ; PS1.1 980,487.01 956.58,487.01 909.65,440.08 861.17,440.08 809.62,491.62 C62.1
C0: 
C1: 
C2: 
C3: 
C4: 
C5: 
C6: 
C7: 
C8: 
C9: 
C10: 
C11: 
C12: 
C13: 
C14: 
C15: 
C16: 
C17: 
C18: 
CAN_N: J24.2 R103.2 U3.6 | length 495.9
  Top Layer w15: J24.2 1533.74,1318.74 1655,1440 1728.15,1440 R103.2 1760.75,1407.4 1809.85,1407.4 1839,1378.25 U3.6
CAN_P: J24.1 R103.1 U3.7 | length 448.5
  Top Layer w12: J24.1 1585,1240 R103.1 1717.6,1364.25 1780.17,1364.25 1801.52,1342.89 U3.7
"Cell 0": 
"Cell 1": 
"Cell 2": 
"Cell 3": 
"Cell 4": 
"Cell 5": 
"Cell 6": 
"Cell 7": 
"Cell 8": 
"Cell 9": 
"Cell 10": 
"Cell 11": 
"Cell 12": 
"Cell 13": 
"Cell 14": 
"Cell 15": 
"Cell 16": 
"Cell 17": 
"Cell 18": 
CellsF1: 
CellsF2: 
CellsF3: 
CellsF4: 
CellsF5: 
CellsF6: 
CellsF7: 
CellsF8: 
CellsF9: 
CellsF10: 
CellsF11: 
CellsF12: 
CellsF13: 
CellsF14: 
CellsF15: 
CellsF16: 
CellsF17: 
CellsF18: 
CellsF18_Relayed: 
Chassis: C61.1 J23.1 K1.3 L2.2 | length 996.4
  Top Layer w10: J23.1@546.26,1353.82 546.26,1220.13 435,1108.87 435,995 455,975 510,975 542.06,1007.06 562.61,1007.06 570.41,1014.86 K1.3 806.98,1028.64 827.65,1049.3 L2.2 827.65,1080.8 854.21,1107.36 C61.1
DRIVE: 
Fault_out: J26.4 K1.4 R108.1 | length 1696.6
  Top Layer w10: K1.4 470.41,1042.42 510.79,1082.8 510.79,1091.3 R108.1 524.49,1099.09 554.19,1069.39 674.39,1069.39 v3(675,1070)
  Bottom Layer w10: v3(675,1070) 675,810 1273.06,211.94 1506.98,211.94 J26.4
GND: C53.1 C54.2 C55.1 C56.1 C57.1 C58.1 C59.2 C60.1 C63.1 C64.2 C65.1 C66.1 C67.2 C68.2 C69.2 C71.2 C72.1 D24.3 IC6.8 IC6.23 IC6.35 IC6.44 IC6.47 IC7.1 IC8.4 J21.4 J26.1 K1.2 K3.3 PS1.4 R96.2 R98.1 R102.1 R104.1 R107.1 S1.C1 S1.D1 U2.1 U2.7 U2.8 U2.13 U2.14 U3.2 Y1.2 Y1.4 | length 413.4
  Top Layer w10: C55.1 1997.97,1021.01 2034.82,1021.01 IC6.35 ; C54.2 2156.58,688.37 2156.58,717.24 IC6.47 ; IC6.23 2342.58,1153.79 C56.1 ; U2.8 U2.7 ; U2.13 U2.14 ; C69.2 C71.2
  other v2: 1635,975
  other v3: 3000,775
HOLD_L: IC8.7 R106.1 | length 178.9
  Top Layer w10: R106.1 2932.07,1175.01 2923.05,1184.03 2903.66,1184.03 2894.64,1193.06 2894.64,1236.61 2918.43,1260.41 IC8.7
HSE_1: C57.2 IC6.5 Y1.3 | length 498.9
  Top Layer w10: C57.2 2328.1,405.92 Y1.3 2380.37,458.19 2380.37,513.89 2344.31,549.95 2344.31,579.31 2420,655 2420,719.34 IC6.5
HSE_2: C58.2 IC6.6 Y1.1 | length 305.3
  Top Layer w10: IC6.6 2447.09,720.09 2447.09,617.86 C58.2 2393.21,563.98 Y1.1
IM: D24.1 R111.1 T3.3 U2.10 | length 878.2
  Top Layer w10: D24.1 2747.87,1072.4 2741.06,1065.59 2741.06,1060 2655,973.94 2655,843.07 2655.81,842.26 2655.81,817.22 2756.8,716.22 U2.10@2763.17,716.22 ; U2.10 2867.59,715.41 2914.81,668.19 2986.3,668.19 R111.1 3074.49,654.49 3095,675 T3.3
IMA_N: 
IMB_N: 
IP: D24.2 R110.1 T3.1 U2.11 | length 866
  Top Layer w10: D24.2 2751.02,996.93 2726.02,996.93 2675,945.91 2675,820.66 2756.06,739.59 2759.48,739.59 2763.98,735.09 U2.11 2807.55,735.09 2845.36,772.9 2845.36,801.7 2872.23,828.57 2911.06,828.57 2938.51,856.02 2938.51,873.63 2960.39,895.51 R110.1 3074.49,895.51 3095,875 T3.1
IPA_P: 
IPB_P: 
"isoSPI + Output": 
"isoSPI - Output": 
"LTC6820 IM": J25.1 T3.4 | length 150.6
  Top Layer w10: T3.4 3549.96,675 3556.26,681.3 3556.26,717.24 3574.88,735.87 J25.1
"LTC6820 IP": J25.2 T3.6 | length 150.1
  Top Layer w10: T3.6 3549.96,875 3556.26,868.7 3556.26,833.23 3574.88,814.61 J25.2
"Mux Output": 
NetC39_2: 
NetC40_2: 
NetC41_1: 
NetC42_1: 
NetC43_2: 
NetC44_2: 
NetC45_2: 
NetC46_2: 
NetC47_2: 
NetC48_1: 
NetC49_1: 
NetC49_2: 
NetC51_2: 
NetC62_2: C62.2 L2.4 PS1.2 | length 296
  Top Layer w10: PS1.2 885.41,514.07 911.19,539.86 C62.2 930.41,666.63 L2.4
NetC66_2: C66.2 F20.1 IC7.2 IC7.4 | length 426.5
  Top Layer w10: IC7.2 IC7.4 1444.95,723.75 1485.93,723.75 C66.2 1580.34,740.41 F20.1
NetC69_1: C69.1 R110.2 R111.2 | length 314.3
  Top Layer w10: R111.2 2899.49,715.51 2882.44,732.56 2882.44,779.92 2904.91,802.39 2904.91,806.13 2911.35,812.57 2934.91,812.57 2956.83,834.49 R110.2
NetC71_1: C71.1 T3.2 | length 62.5
  Top Layer w10: C71.1 T3.2
NetC72_2: C72.2 T3.5 | length 212.5
  Top Layer w10: C72.2 v1(3510,620) ; v1(3510,725) T3.5 T3.5
  Bottom Layer w10: v1(3510,620) v1(3510,725)
NetD2_1: 
NetD2_2: 
NetD3_1: 
NetD3_2: 
NetD4_1: 
NetD4_2: 
NetD5_1: 
NetD5_2: 
NetD6_1: 
NetD6_2: 
NetD7_1: 
NetD7_2: 
NetD8_1: 
NetD8_2: 
NetD9_1: 
NetD9_2: 
NetD10_1: 
NetD10_2: 
NetD11_1: 
NetD11_2: 
NetD12_1: 
NetD12_2: 
NetD13_1: 
NetD13_2: 
NetD14_1: 
NetD14_2: 
NetD15_1: 
NetD15_2: 
NetD16_1: 
NetD16_2: 
NetD17_1: 
NetD17_2: 
NetD18_1: 
NetD18_2: 
NetD19_1: 
NetD19_2: 
NetD22_1: D22.1 R102.2 | length 89.5
  Top Layer w10: D22.1 2312.58,1352.42 R102.2
NetD25_1: 
NetD25_2: 
NetF19_1: F19.1 J23.2 | length 346.8
  Top Layer w10: J23.2 926.54,1340 955.08,1368.54 F19.1
NetIC1_2: 
NetIC1_4: 
NetIC1_5: 
NetIC1_6: 
NetIC1_8: 
NetIC1_9: 
NetIC1_13: 
NetIC1_14: 
NetIC1_15: 
NetIC1_17: 
NetIC1_19: 
NetIC2_9: 
NetIC2_10: 
NetIC3_9: 
NetIC3_10: 
NetIC4_5: 
NetIC5_9: 
NetIC5_10: 
NetIC6_1: IC6.1
NetIC6_2: IC6.2
NetIC6_3: IC6.3
NetIC6_4: IC6.4
NetIC8_3: IC8.3 R107.2 | length 81.2
  Top Layer w10: IC8.3 3229.08,1310.41 R107.2
NetJ19_MP1: 
NetJ19_MP2: 
NetJ20_MP1: 
NetJ20_MP2: 
NetK1_1: K1.1 R109.1 | length 150.9
  Top Layer w10: R109.1 470.41,655.92 K1.1
NetK3_4: K3.4 R93.2 | length 80
  Top Layer w10: K3.4 2818.78,211.73 R93.2
NetPS1_8: PS1.8
NetQ1_1: 
NetQ2_1: 
NetQ3_1: 
NetQ4_1: 
NetQ5_1: 
NetQ6_1: 
NetQ7_1: 
NetQ8_1: 
NetQ9_1: 
NetQ10_1: 
NetQ11_1: 
NetQ12_1: 
NetQ13_1: 
NetQ14_1: 
NetQ15_1: 
NetQ16_1: 
NetQ17_1: 
NetQ18_1: 
NetR82_1: 
NetR83_1: 
NetR83_2: 
NetR95_1: R95.1 U2.16 | length 119
  Top Layer w10: R95.1@2712.07,891.59 R95.1@2719.49,884.17 ; R95.1 R95.1@2719.49,884.17 ; R95.1@2725.77,871.73 R95.1@2725.77,877.81 ; U2.16 2763.98,833.52 2763.17,834.33 2763.17,840.42 R95.1@2725.77,877.81 ; R95.1@2719.49,884.17 2719.49,884.09 R95.1@2725.77,877.81 ; R95.1@2719.49,884.17 2725.77,877.89 R95.1@2725.77,877.81
NetR95_2: R95.2 R96.1 U2.15 | length 163.7
  Top Layer w10: R95.2 R96.1@2829.97,890 ; U2.15 2783.09,814.33 2810.77,814.33 2822,825.57 2822,882.03 R96.1@2829.97,890 ; R96.1 R96.1@2829.97,890
NetR104_2: R104.2 U3.8 | length 69.3
  Top Layer w10: R104.2 1764.74,1307.56 U3.8@1774.37,1307.56
NetT1_5: 
NetU1_40: 
NetU1_41: 
NetU1_44: 
NetU1_45: 
NetU1_46: 
NetU1_47: 
NetU1_52: 
NetU1_53: 
NetU1_54: 
NetU3_5: U3.5
PA0: IC6.10 J26.7 | length 1204
  Top Layer w10: J26.7 1881.26,200 v1(1980,200) ; v1(2345,920) 2347.61,917.39 2361.14,917.39 IC6.10
  Bottom Layer w10: v1(1980,200) 2040.91,200 2345,504.09 v1(2345,920)
PA1: J26.3 R101.1 | length 220
  Top Layer w10: J26.3 1491.3,129.09 1539.49,80.91 R101.1
PA1_filt: C59.1 IC6.11 R101.2 | length 1518.1
  Top Layer w10: R101.2 v1(1670,75) C59.1 ; IC6.11 2473.87,832.5 2473.87,809.09 v1(2476.48,806.48)
  Bottom Layer w10: v1(1670,75) 1720,25 1931.59,25 2475,568.41 2475,805 v1(2476.48,806.48)
PA2: IC6.12 J26.5 | length 1420.4
  Top Layer w10: J26.5 1656.34,275 1786.34,145 v1(1925,145) ; v1(2390,925) 2391.77,923.23 2410.98,923.23 IC6.12
  Bottom Layer w10: v1(1925,145) 2013.64,145 2390,521.36 v1(2390,925)
PA3: IC6.13 J26.6 | length 1521.2
  Top Layer w10: J26.6 1827.52,175 2030,175 v1(2075,130) ; IC6.13 2458.48,991.3 2495.02,991.3 2511.31,975 v1(2515,975)
  Bottom Layer w10: v1(2075,130) 2515,570 v1(2515,975)
PA4: IC6.14 | length 0
PA5: IC6.15 IC8.6 R98.2 U2.4 | length 946.7
  Top Layer w10: IC6.15 2415.56,1002.78 2437.78,1025 2554.03,1025 ; U2.4 2586.45,774.46 2554.03,806.88 2554.03,1025 ; IC8.6 2931.74,1306.49 2896.49,1306.49 2822.07,1232.07 2780.47,1232.07 2615.39,1066.98 R98.2 2554.03,1025
  other v2: 2825,1235
PA6: IC6.16 IC8.2 R97.1 U2.3 | length 2134.9
  Top Layer w10: IC6.16 2432.22,1048.56 2448.08,1048.56 2519.16,1119.64 R97.1 2795.33,1415 2955,1415 3109.59,1260.41 3244.59,1260.41 v2(3285,1220) ; U2.3 2646.62,794.15 v1(2677.88,762.88)
  Bottom Layer w10: v1(2677.88,762.88) 2907.88,762.88 3093.94,948.94 3158.94,948.94 3335,1125 3335,1170 v2(3285,1220)
PA7: IC6.17 IC8.5 U2.2 | length 1065.6
  Top Layer w10: IC6.17 2424.59,1068.76 2436.02,1068.76 v1(2438.63,1071.37) ; v1(2601.32,944.5) 2583.26,926.43 2583.26,895.63 2570.03,882.4 2570.03,824.78 2580.97,813.83 U2.2 ; v2(2825,1320) 2865.41,1360.41 IC8.5
  Bottom Layer w10: v1(2438.63,1071.37) 2474.45,1071.37 v1(2601.32,944.5) ; v1@2601.32,946.32 2710,1055 2710,1205 v2(2825,1320)
PA8: IC6.29 | length 1.3
  Top Layer w10: IC6.29 IC6.29@2150.48,1073.66
PA9: IC6.30
PA10: IC6.31 | length 0
PA11: IC6.32 U3.4 | length 264.9
  Top Layer w10: U3.4 2085,1209.06 2085,1055.62 2108.72,1031.9 IC6.32
PA12: IC6.33 U3.1 | length 228.3
  Top Layer w10: U3.1 1995.81,1086.11 2005.35,1086.11 2033.46,1058 2053.51,1058 IC6.33
PA13: IC6.34 J21.2 | length 1006.2
  Top Layer w10: J21.2 1298.63,1070.11 1995.04,1070.11 2023.15,1042 2041.67,1042 IC6.34
PA14: IC6.37 J21.3 | length 1004.7
  Top Layer w10: J21.3 1255,1035 1814.09,1035 1870.09,979 1915.85,979 1954.44,940.41 1963.55,940.41 1966.72,943.58 1975,943.58 2039.13,879.45 2040.41,879.45 IC6.37
PA15: IC6.38 | length 1.3
  Top Layer w10: IC6.38@2065.69,878.17 IC6.38
PB0: IC6.18 J26.8 | length 1170.8
  Top Layer w10: IC6.18 2403.66,1075.68 2403.66,1100.92 v1(2403.87,1101.13)
  Bottom Layer w10: J26.8 1885,685 2301.13,1101.13 v1(2403.87,1101.13)
PB1: IC6.19
PB2: IC6.20
PB3: IC6.39 | length 1.3
  Top Layer w10: IC6.39@2079.61,864.25 IC6.39
PB4: IC6.40 | length 1.3
  Top Layer w10: IC6.40@2093.52,850.34 IC6.40
PB5: IC6.41 | length 1.3
  Top Layer w10: IC6.41@2107.44,836.42 IC6.41
PB6: IC6.42 R99.1 U2.5 | length 918.1
  Top Layer w10: v2(1895,865) 1951.58,808.42 R99.1 ; R99.1@1955.75,792.4 2005.61,792.4 2091.25,792.39 2121.44,822.57 2122.64,822.57 2162.47,862.39 2184.22,862.39 v1(2186.83,865) ; v1(2492.19,860) 2494.8,857.39 2494.8,833.89 2573.91,754.78 U2.5
  Bottom Layer w10: v1(2186.83,865) 2239.68,865 2324.68,950 2405,950 2492.19,862.81 v1(2492.19,860)
PB7: IC6.43 IC8.1 R105.1 | length 1936.5
  Top Layer w10: R105.1@2047.4,695.75 2047.4,747.4 2076,776 2103.99,776 IC6.43 2170.18,842.19 2196.28,842.19 2205.09,851 2219.14,851 2225,856.86 v1(2225,890) ; IC8.1 3209.59,1210.41 v2(3285,1135)
  Bottom Layer w10: v1@2225.43,890.43 2391.41,1056.41 2529,1194 2529,1269 2696,1436 2996.93,1436 3285,1147.93 v2(3285,1135)
PB8: IC6.45 R93.1 | length 1414.4
  Top Layer w10: IC6.45 2198.66,815 v1(2220,815) ; v1(2200,410) 2200,270 2435,35 2745,35 v2(2780,70) 2785.04,75.04 2785.04,114.53 2800.39,129.88 2800.39,135.79 2814.09,149.49 R93.1
  Bottom Layer w10: v1(2200,410) 2220,430 v1(2220,815)
PB9: IC6.46 R109.2 | length 2559.8
  Top Layer w10: R109.2 470,525 390,445 390,264.99 631.21,23.78 733.78,23.78 1165,455 v2(1420,455) 1770,455 v1(1940,625) ; v1(2075,735) 2076.43,733.57 2145.07,733.57 IC6.46
  Bottom Layer w10: v1(1940,625) 1995,680 2020,680 v1(2075,735)
PB10: IC6.21 J26.9 | length 964.6
  Top Layer w10: J26.9@1963.74,271 J26.9@1965.03,269.71 ; v1(2285,1035) 2287.61,1037.61 2287.61,1043.14 IC6.21
  Bottom Layer w10: J26.9@1965,275 1965,583.53 2097.81,716.34 2097.81,845.07 2285,1032.26 v1(2285,1035)
PB11: IC6.22 J26.10 | length 941.1
  Top Layer w10: v1(2265,980) 2262.39,982.61 2262.39,992.24 2262.19,992.44 2262.19,1045.56 IC6.22
  Bottom Layer w10: J26.10@2042.63,275 2042.63,638.53 2113.81,709.71 2113.81,828.81 v1(2265,980)
PB12: IC6.25 | length 1.3
  Top Layer w10: IC6.25@2206.16,1126.77 IC6.25
PB13: IC6.26
PB14: IC6.27 | length 1.3
  Top Layer w10: IC6.27@2178.32,1098.94 IC6.27
PB15: IC6.28 | length 32.1
  Top Layer w10: IC6.28 2164.4,1085.02 2186.19,1063.23
RESET: C60.2 IC6.7 R100.1 S1.A1 S1.B1 | length 1126.5
  Top Layer w10: S1.A1 2465,234.23 ; IC6.7 2535,660.02 2535,480 2465,410 2465,234.23 ; R100.1 2545,238.53 S1.B1 ; C60.2 2640.08,187.56 2593.41,234.23 S1.B1 ; 2465,234.23 S1.B1
S1: 
S2: 
S3: 
S4: 
S5: 
S6: 
S7: 
S8: 
S9: 
S10: 
S11: 
S12: 
S13: 
S14: 
S15: 
S16: 
S17: 
S18: 
SCL: 
SDA: 
SDC+: J30.1 K3.1 | length 173.4
  Top Layer w10: K3.1 3198.74,290 J30.1
SDC-: J30.2 K3.2 | length 172.9
  Top Layer w10: K3.2 3046.22,385 3205,385 J30.2
TEMP1: 
TEMP2: 
TEMP3: 
TEMP4: 
TEMP5: 
TEMP6: 
TEMP7: 
TEMP8: 
TEMP9: 
TEMP10: 
TEMP11: 
TEMP12: 
TEMP13: 
TEMP14: 
TEMP15: 
TEMP16: 
TEMP17: 
TEMP18: 
"Temp Input": 
V+: 
V-: 
pads on no net: J25.3 J25.4
copper on no net: | length 7.1
  Top Layer w10: 2150,1370 2155,1375

## Polygon pours and split planes (outlines as drawn)
GND on Top Layer "GND_L01_P000" (solid, remove dead copper, pour order 0): 360,1265 218.21,1123.21 0,1123.21 -0.09,1123.12 -0.09,363.59 211.41,363.59 360,215 360,0 3600,0 3600.03,0.03 3600.03,220.03 3740,360 3960,360 3960,1120 3745,1120 3600,1265 3600,1485 360,1485

## Other copper
Top Layer:

## Silkscreen, mask and mechanical layers (free items; w line width, h text height)
Top Overlay:
  drawing of 64 lines, arcs and shapes, not listed
  text "POWER INPUT" at 460,1435 h25
  text "DEBUG" at 1085,1430 h25
  text "CANBUS" at 1375,1420 h25
  text "HEADER" at 1075,1390 h25
  text "-" at 417,1367.01 h40
  text "+" at 727,1365.34 h40
  text "-" at 1312,1312.01 h40
  text "SPI_MOSI" at 2600,1309.17 h25
  text "SPI_SCK" at 2620,1224.17 h25
  text "+" at 1312,1210.34 h40
  text "SPI_MISO" at 3330,1209.17 h25
  text ">4mm" at 3795,1190 h25
  text "SPI_CS2" at 3330,1124.17 h25
  text "3.3V" at 1345,1025 h25
  text "5V" at 1490,1025 h25
  text "GND" at 1600,1025 h25
  text "ISOSPI OUT" at 3700,985 h25
  text "P" at 3592,957 h35
  text "SPI_CS1" at 1695,854.17 h25
  text "M" at 3587,552 h35
  text "SDC" at 3200,485 h25
  text "FAULT_OUT" at 1465,444.17 h25
  text "-" at 3352,377.01 h40
  text "+" at 3352,270.34 h40
  text "3M" at 3807,232 h40
  text "MCU Breakout Board" at 3140,85 h25
  text "FAULT_IN" at 2825,59.17 h25
  text "Not High Voltage" at 3205,33.33 h25
Bottom Overlay:
  text "RFR 2024" at 3715,160 h25
  text "Thomas Forzani" at 3715,110 h25
  text "ttf17@scarletmail.rutgers.edu" at 3715,58.33 h25
Mechanical 1:
  lines w10: 0,120 ccw(c120,120) 120,0 3840.47,0 ccw(c3840.47,120) 3960.47,120 3960.47,1364.09 ccw(c3840.47,1364.09) 3840.47,1484.09 120,1484.09 ccw(c120,1364.09) 0,1364.09 0,120 ; 3235,655 ccw(c3345,655) 3455,655 3455,895 ccw(c3345,895.11) 3235,895 3235,655